# Altium PCB DeviceControl.PcbDoc
Units mm, origin at the board's own origin, x right, y up, seen from the top; angles counter-clockwise.
Board outline 210.5 x 151.5 mm, 2 copper layers (Top Layer, Bottom Layer); 64 components, 55 nets, 213 pads, 0 vias.
Unrouted connection lines stored in the file: 140.
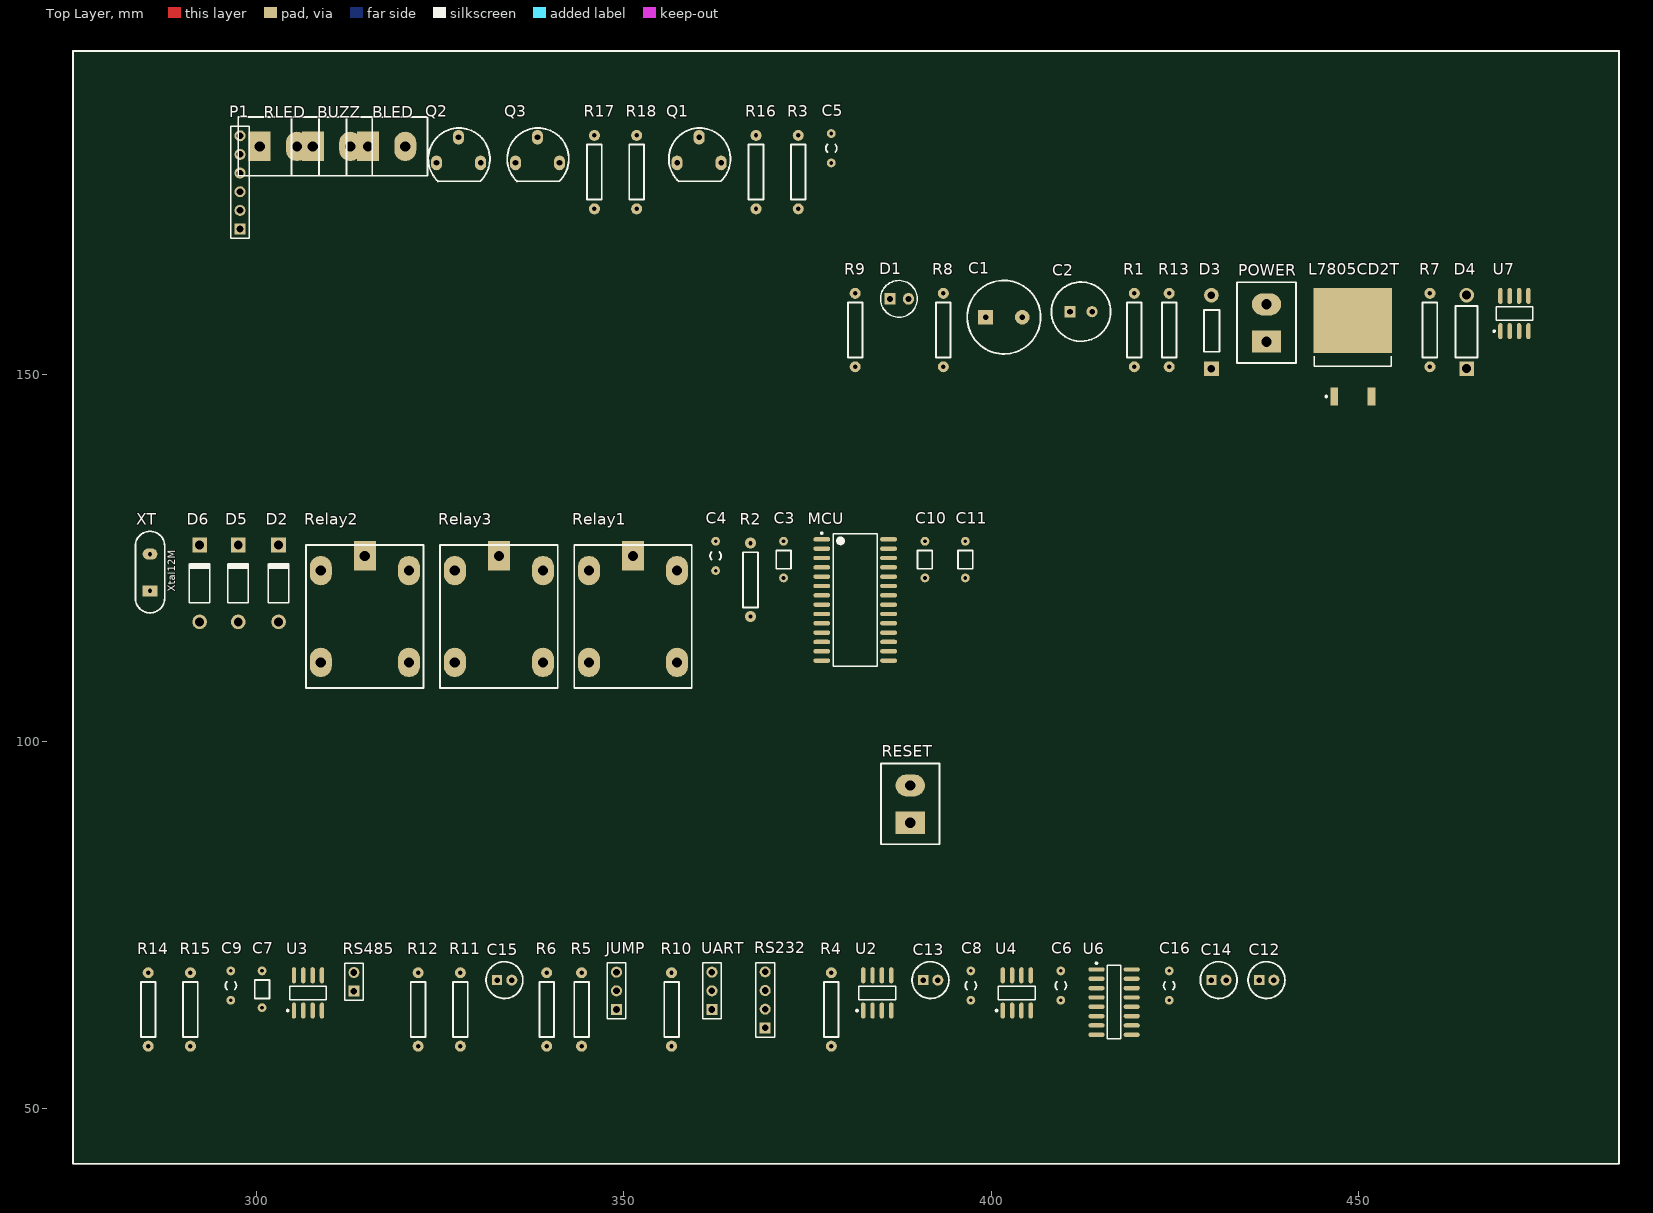
[diagram p0: Top Layer view]
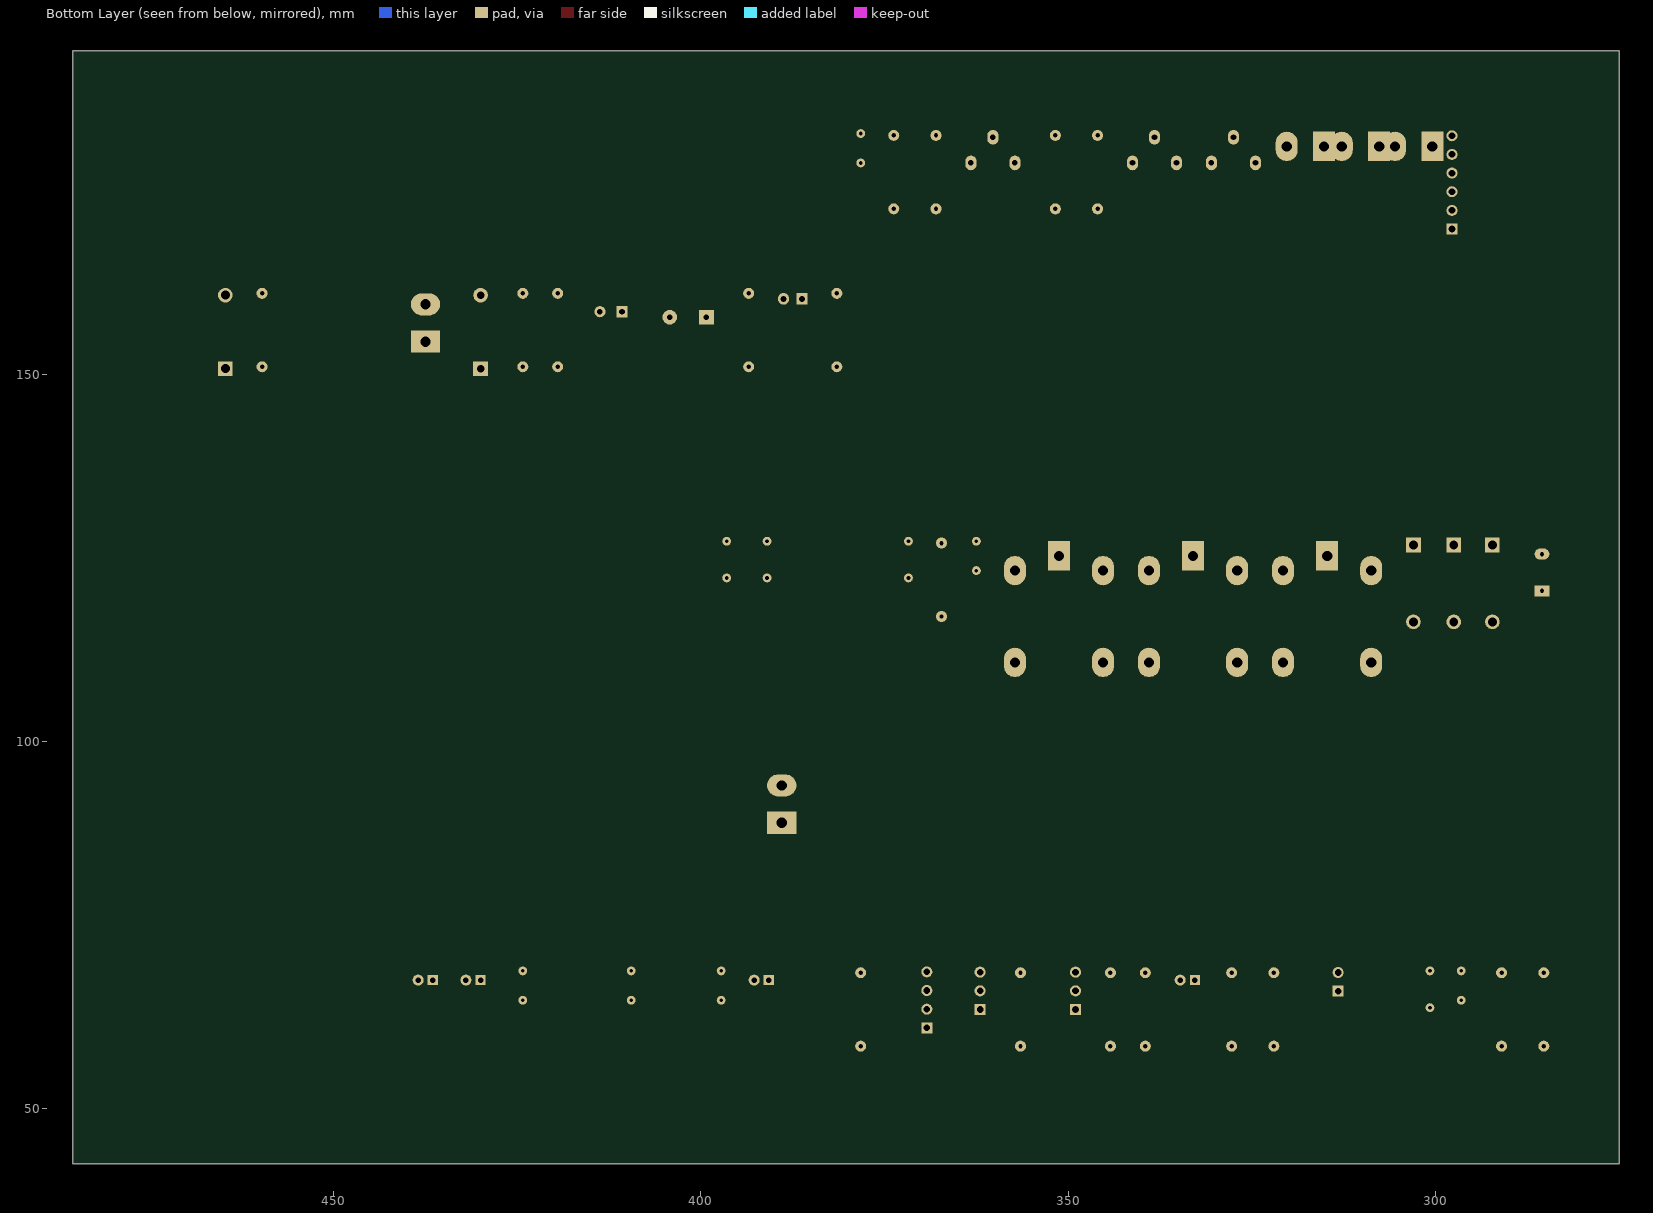
[diagram p1: Bottom Layer view, seen from below]

## Layer stack, top to bottom
Top Layer: signal copper 0.0356
Dielectric: dielectric 0.32, FR-4, Dk 4.8
Bottom Layer: signal copper 0.0356

## Board outline
275,194 275,42.5 485.5,42.5 485.5,194 275,194

## Design rules (kind name [scope] priority, off if disabled: settings)
Clearance [All] p1: gap=0.5
PlaneClearance [All] p1: clearance=0.8
PlaneConnect [All] p1: planeconnectstyle=Relief reliefexpansion=1 reliefentries=4 reliefconductorwidth=1 reliefairgap=1
PolygonConnect [All] p1: connectstyle=Relief reliefconductorwidth=1 reliefentries=4 polygonreliefangle="90 Angle"
RoutingLayers [All] p1: top layer_v5=FALSE bottom layer_v5=TRUE
RoutingTopology [All] p1: topology=Daisy_Balanced
RoutingVias [All] p1: holewidth=1 width=1.5 viastyle="Through Hole" minholewidth=0.711 minwidth=1.27 maxholewidth=1.5 maxwidth=2
SilkscreenOverComponentPads [All] p1: minsilkscreentomaskgap=0.254
SolderMaskExpansion [All] p1: expansion=1
Width [All] p1: maxlimit=2 minlimit=0.4 preferedwidth=1
23 further rules are at their usual default settings.

## Components (designator, comment, footprint, x,y, rotation, side; value= is the part's Value field where it differs from the comment)
BLED "Header 2" "Header2 - duplicate" 320.249,181 r0 top
BUZZ "Header 2" "Header2 - duplicate" 312.749,181 r0 top
C1 "Cap2" "TU 220uF/50V" 399.249,157.75 r0 top
C2 "Cap2" "tu 100uF/50v" 412.749,158.5 r0 top
C3 "Cap" C104_YELLOW 371.749,124.75 r90 top
C4 "Cap" C104_PINK 362.499,125.25 r90 top
C5 "Cap" C104_PINK 378.249,180.75 r90 top
C6 "Cap" C104_PINK 409.499,66.75 r90 top
C7 "Cap" C104_YELLOW 300.749,66.25 r90 top
C8 "Cap" C104_PINK 397.249,66.75 r90 top
C9 "Cap" C104_PINK 296.499,66.75 r90 top
C10 "Cap Pol1" C104_YELLOW 390.999,124.75 r90 top
C11 "Cap Pol1" C104_YELLOW 396.499,124.75 r90 top
C12 "Cap Pol1" "tu 10uF" 438.498,70.5 r0 top
C13 "Cap Pol1" "tu 10uF" 392.749,70.5 r0 top
C14 "Cap Pol1" "tu 10uF" 431.999,70.5 r0 top
C15 "Cap Pol1" "tu 10uF" 334.749,70.5 r0 top
C16 "Cap" C104_PINK 424.249,66.75 r90 top
D1 "LED0" LED_3 387.249,160.25 r0 top
D2 "Diode 1N4007" DIO10.46-5.3x2.8 302.999,121.5 r90 top
D3 "Diode 1N4007" D_1A 429.999,150.75 r90 top
D4 "Diode 2A" D_2A 464.749,150.75 r90 top
D5 "Diode 1N4007" DIO10.46-5.3x2.8 297.499,121.5 r90 top
D6 "Diode 1N4007" DIO10.46-5.3x2.8 292.249,121.5 r90 top
JUMP "Header 3" HDR1X3 348.999,63.5 r90 top
L7805CD2T "Volt Reg" TO254P1510-3_4N 449.249,153.75 r90 top
MCU "PIC16F886-E/SO" SOIC-SO28_N 381.499,119.25 r0 top
P1 "Header 6" HDR1X6 297.749,169.75 r90 top
POWER "Header 2" "Header2 - duplicate" 437.499,159.5 r90 top
Q1 "C945" C1815 359.749,180.75 r0 top
Q2 "C945" C1815 326.999,180.75 r0 top
Q3 "C945" C1815 337.749,180.75 r0 top
R1 "1K" R_Nor 419.499,156 r90 top
R2 "10K" R_Nor 367.249,122 r90 top
R3 "10K" R_Nor 373.749,177.5 r90 top
R4 "560R" R_Nor 378.249,63.5 r90 top
R5 "560R" R_Nor 344.249,63.5 r90 top
R6 "120R" R_Nor 339.499,63.5 r90 top
R7 "560R" R_Nor 459.749,156 r90 top
R8 "560R" R_Nor 393.499,156 r90 top
R9 "120R" R_Nor 381.499,156 r90 top
R10 "560R" R_Nor 356.499,63.5 r90 top
R11 "560R" R_Nor 327.749,63.5 r90 top
R12 "120R" R_Nor 321.999,63.5 r90 top
R13 "4K7" R_Nor 424.249,156 r90 top
R14 "4K7" R_Nor 285.249,63.5 r90 top
R15 "120R" R_Nor 290.999,63.5 r90 top
R16 "1K" R_Nor 367.999,177.5 r90 top
R17 "1K" R_Nor 345.999,177.5 r90 top
R18 "1K" R_Nor 351.749,177.5 r90 top
Relay1 "Relay12" "Role 12V" 347.249,114.75 r90 top
Relay2 "Relay12" "Role 12V" 310.749,114.75 r90 top
Relay3 "Relay12" "Role 12V" 328.999,114.75 r90 top
RESET "Header 2" "Header2 - duplicate" 389,94 r90 top
RLED "Header 2" "Header2 - duplicate" 305.499,181 r0 top
RS232 "Header 4" HDR1X4 369.249,61 r90 top
RS485 "Header 2" HDR1X2 313.249,66 r90 top
U2 "MAX485CSA" NSO8_N 384.499,65.75 r90 top
U3 "MAX485CSA" NSO8_N 306.999,65.75 r90 top
U4 "MAX485CSA" NSO8_N 403.499,65.75 r90 top
U6 "MAX232ACSE" NSO16_N 416.749,64.5 r0 top
U7 "NE555D" D008_N 471.249,158.25 r90 top
UART "Header 3" HDR1X3 361.999,63.5 r90 top
XT "XTAL" Xtal12M 287.499,123.5 r90 top

## Footprints (in the part's own frame and the unit in brackets; to place one, negate y for a bottom-side part, rotate by r counter-clockwise, add the part's x,y. Pads: shape width x height; smd on the part's side, far side on the other; paste and mask are expansions set on the pad)
C104_PINK [mm]
  round 1.2 hole 0.5: 1(-2,0) 2(2,0)
  silkscreen extent -0.53,-0.75 0.53,0.75, body extent -2.42,-1 2.5,1, height 6.96
C104_YELLOW [mm]
  round 1.2 hole 0.5: 1(-2.5,0) 2(2.5,0)
  silkscreen extent -1.25,-1 1.25,1
C1815 [mm]
  oval 1.524x2 hole 0.762: 1(-2.5,-2) 2(0.5,1.5) 3(3.5,-2)
  silkscreen extent -3.62,-4.52 4.76,2.75
D008_N [mm] "SOIC, 8-Leads, Body 4.9x3.9mm, Pitch 1.27mm, IPC Medium Density"
  oval 2.2x0.6 smd: 1(-2.4,1.905) 2(-2.4,0.635) 3(-2.4,-0.635) 4(-2.4,-1.905) 5(2.4,-1.905) 6(2.4,-0.635) 7(2.4,0.635) 8(2.4,1.905)
  silkscreen extent -2.52,-2.5 0.9,2.88, body extent -1.95,-2.45 1.95,2.45, height 1.75
D_1A [mm]
  rect 2x2 hole 1: 1(0,0)
  round 2 hole 1: 2(10,0)
  silkscreen extent 2.3,-1.1 8,1
D_2A [mm]
  rect 2x2 hole 1.2: 1(0,0)
  round 2 hole 1.2: 2(10,0)
  silkscreen extent 1.5,-1.5 8.5,1.5
DIO10.46-5.3x2.8 [mm] "Diode, Axial; Body 5.2 x 2.7 mm (LxDia. max), Lead Dia. 0.86 mm (max)"
  round 2 hole 1.2: 1(-5.23,0)
  rect 2x2 hole 1.2: 2(5.23,0)
  silkscreen extent -2.65,-1.4 2.75,1.4
HDR1X2 [mm] "Connector; Header; 2 Position"
  rect 1.5x1.5 hole 0.9: 1(0,0)
  round 1.5 hole 0.9: 2(2.54,0)
  silkscreen extent -1.27,-1.27 3.81,1.27
HDR1X3 [mm] "Connector; Header; 3 Position"
  rect 1.5x1.5 hole 0.9: 1(0,0)
  round 1.5 hole 0.9: 2(2.54,0) 3(5.08,0)
  silkscreen extent -1.27,-1.27 6.35,1.27
HDR1X4 [mm] "Connector; Header; 4 Position"
  rect 1.5x1.5 hole 0.9: 1(0,0)
  round 1.5 hole 0.9: 2(2.54,0) 3(5.08,0) 4(7.62,0)
  silkscreen extent -1.27,-1.27 8.89,1.27
HDR1X6 [mm] "Connector; Header; 6 Position"
  rect 1.5x1.5 hole 0.9: 1(0,0)
  round 1.5 hole 0.9: 2(2.54,0) 3(5.08,0) 4(7.62,0) 5(10.16,0) 6(12.7,0)
  silkscreen extent -1.27,-1.27 13.97,1.27
"Header2 - duplicate" [mm]
  rect 3x4 hole 1.4: 1(-5.08,0)
  oval 3x4 hole 1.4: 2(0,0)
  silkscreen extent -8,-4 3,4
LED_3 [mm]
  rect 1.5x1.6 hole 0.8: 1(-1,0)
  oval 1.5x1.6 hole 0.8: 2(1.5,0)
  silkscreen extent -2.3,-2.5 2.7,2.5, body extent -1.24,-1.99 2.24,2, height 5.2
NSO8_N [mm] "SOIC, 8-Leads, Body 4.9x3.9mm, Pitch 1.27mm, IPC Medium Density"
  oval 2.2x0.6 smd: 1(-2.4,1.905) 2(-2.4,0.635) 3(-2.4,-0.635) 4(-2.4,-1.905) 5(2.4,-1.905) 6(2.4,-0.635) 7(2.4,0.635) 8(2.4,1.905)
  silkscreen extent -2.52,-2.5 0.9,2.88, body extent -2,-2.5 2,2.5, height 1.75
NSO16_N [mm] "SOIC, 16-Leads, Body 9.9x3.9mm, Pitch 1.27mm, IPC Medium Density"
  oval 2.2x0.6 smd: 1(-2.4,4.445) 2(-2.4,3.175) 3(-2.4,1.905) 4(-2.4,0.635) 5(-2.4,-0.635) 6(-2.4,-1.905) 7(-2.4,-3.175) 8(-2.4,-4.445) 9(2.4,-4.445) 10(2.4,-3.175) 11(2.4,-1.905) 12(2.4,-0.635) 13(2.4,0.635) 14(2.4,1.905) 15(2.4,3.175) 16(2.4,4.445)
  silkscreen extent -2.52,-5 0.9,5.42, body extent -2,-5 2,5, height 1.75
R_Nor [mm]
  round 1.5 hole 0.6: 1(-5,0) 2(5,0)
  silkscreen extent -3.75,-1 3.75,1, body extent -5.4,-1.25 5.4,1.15, height 2.6
"Role 12V" [mm]
  rect 4x3 hole 1.4: 1(10.5,-4)
  oval 4x3 hole 1.4: 2(-4,-10) 3(-4,2) 4(8.5,2) 5(8.5,-10)
  silkscreen extent -7.5,-12 12,4, body extent -3.35,-9.55 12.35,2.75, height 13.46
SOIC-SO28_N [mm] "SOIC, 28-Leads, Body 17.9x7.5mm, Pitch 1.27mm, IPC Medium Density"
  oval 2.3x0.6 smd: 1(-4.55,8.255) 2(-4.55,6.985) 3(-4.55,5.715) 4(-4.55,4.445) 5(-4.55,3.175) 6(-4.55,1.905) 7(-4.55,0.635) 8(-4.55,-0.635) 9(-4.55,-1.905) 10(-4.55,-3.175) 11(-4.55,-4.445) 12(-4.55,-5.715) 13(-4.55,-6.985) 14(-4.55,-8.255) 15(4.55,-8.255) 16(4.55,-6.985) 17(4.55,-5.715) 18(4.55,-4.445) 19(4.55,-3.175) 20(4.55,-1.905) 21(4.55,-0.635) 22(4.55,0.635) 23(4.55,1.905) 24(4.55,3.175) 25(4.55,4.445) 26(4.55,5.715) 27(4.55,6.985) 28(4.55,8.255)
  silkscreen extent -4.67,-9.05 3,9.23, body extent -3.8,-9.06 3.8,9.06, height 2.65
TO254P1510-3_4N [mm] "D2-PAK, 4-Leads, Body 8.8x10.4mm, Pitch 2.54mm, Lead Span 15.1mm, IPC Medium Density"
  rect 2.4x1.05 smd: 1(-6.8,2.54) 3(-6.8,-2.54)
  rect 8.9x10.65 smd: 2(3.55,0)
  silkscreen extent -6.92,-5.25 -1.3,5.25, body extent -2.7,-5.28 6.3,5.28, height 4.69
"tu 10uF" [mm]
  rect 1.4x1.4 hole 0.762: 1(-2,-3)
  round 1.5 hole 0.762: 2(0,-3)
  silkscreen extent -3.5,-5.5 1.5,-0.5
"tu 100uF/50v" [mil]
  rect 60x60 hole 30: 1(-78.74,0)
  round 60 hole 30: 2(39.37,0)
  silkscreen extent -178,-159 139,159
"TU 220uF/50V" [mm]
  rect 2x2 hole 0.762: 1(0,0)
  round 2 hole 0.762: 2(5,0)
  silkscreen extent -2.5,-5 7.5,5
Xtal12M [mm]
  rect 1.5x2 hole 0.6: 1(-3,2)
  oval 1.5x2 hole 0.6: 2(2,2)
  silkscreen extent -6,0 5.1,4, body extent -5.83,0.45 4.83,3.5, height 3.19

## Part data
BLED BUZZ POWER RESET RLED RS485: "Header, 2-Pin"
C1 C2: "Capacitor"
C3 C4 C5 C6 C7 C8 C9 C16: library part Ceramic, "Capcitor"
C10 C11 C12 C13 C14 C15: "Polarized Capacitor (Radial)"
D1: "Typical INFRARED GaAs LED"
D2 D3 D5 D6: "1 Amp General Purpose Rectifier"
D4: library part "Diode 1N4007", "1 Amp General Purpose Rectifier"
JUMP UART: "Header, 3-Pin"
L7805CD2T: "Voltage Regulator"
MCU: "Flash-Based, 8-Bit CMOS Microcontroller with nanoWatt Technology, 8K (x14-Bit words) Program Memory, 624 Bytes Data Memory, 24 I/O pins, 28-Pin SOIC, Standard VDD Range, Extended Temperature"
P1: "Header, 6-Pin"
Q1 Q2 Q3: library part 2N3904, "NPN General Purpose Amplifier"
R1 R2 R3 R4 R5 R6 R7 R8 R9 R10 R11 R12 R13 R14 R15 R16 R17 R18: library part Res
Relay1 Relay2 Relay3: library part Role_12V
RS232: "Header, 4-Pin"
U2 U3 U4: "Low-Power, Slew-Rate-Limited RS-485/RS-422 Transceiver"
U6: "+5V Powered, Multi-Channel RS-232 Driver/Receiver"
U7: "Precision Timer"
XT: "Crystal Oscillator"

## Nets (pads, with @x,y where several pads share a name; then routed paths per layer and width w, separated by ;. In a path a pad name is that pad's centre, name@x,y a point inside that pad or via, vN(x,y) a via of type N, cw(c..) or ccw(c..) an arc to the next point about the centre after c; other vN are vias at no path point)
12V: D2.2 D4.1 D5.2 D6.2 POWER.1 Relay1.4 Relay2.4 Relay3.4
A_485: R4.1 R6.1 R7.1 R9.1 R10.1 R12.1 RS485.1 U2.6 U3.6 U4.6
B_485: R5.2 R6.2 R8.2 R9.2 R11.2 R12.2 RS485.2 U2.7 U3.7 U4.7
BLED: MCU.2
BUZZ: MCU.4
DI: MCU.17 U3.4
EN: JUMP.1 MCU.16 U3.2 U3.3 U7.3
GND: C1.2 C2.2 C3.2 C4.2 C5.2 C6.2 C7.1 C8.1 C9.1 C10.2 C11.2 C15.1 C16.1 D1.2 L7805CD2T.2 MCU.8 MCU.19 P1.3 POWER.2 Q1.1 Q2.1 Q3.1 R5.1 R8.1 R11.1 RESET.1 RS232.4 U2.5 U3.5 U4.5 U6.15 U7.1
ICSPCLK: MCU.27 P1.5
ICSPDAT: MCU.28 P1.4
LVP: P1.6
MCLR: MCU.1 P1.1 R3.1
NetBLED_1: BLED.1 Relay1.1
NetBLED_2: BLED.2 Relay1.3
NetBUZZ_1: BUZZ.1 Relay3.1
NetBUZZ_2: BUZZ.2 Relay3.3
NetC1_1: C1.1 D4.2 L7805CD2T.1
NetC4_1: C4.1 MCU.10 XT.2
NetC5_1: C5.1 MCU.9 XT.1
NetC10_1: C10.1 U7.5
NetC11_1: C11.1 R15.2 U7.6 U7.7
NetC12_1: C12.1 U6.1
NetC12_2: C12.2 U6.3
NetC13_1: C13.1 U6.4
NetC13_2: C13.2 U6.5
NetC14_1: C14.1 U6.2
NetC15_2: C15.2 U6.6
NetD1_1: D1.1 R1.1
NetD2_1: D2.1 Q2.2 Relay2.5
NetD3_1: D3.1 R13.1
NetD5_1: D5.1 Q1.2 Relay1.5
NetD6_1: D6.1 Q3.2 Relay3.5
NetJUMP_2: JUMP.2 U4.2 U4.3
NETLABEL9: R16.2
NETLABEL10: R17.2
NETLABEL11: R18.2
NetQ1_3: Q1.3 R16.1
NetQ2_3: Q2.3 R17.1
NetQ3_3: Q3.3 R18.1
NetR14_2: R14.2 U7.4
NetRelay2_1: Relay2.1 RLED.1
NetRelay2_3: Relay2.3 RLED.2
RESET: MCU.5 R2.1 RESET.2
RLED: MCU.3
RO: MCU.18 U3.1
RTS: RS232.3 U6.8
RTS_TLL: JUMP.3 U6.9
RX: RS232.1 U6.14
RX1: U2.1 UART.1
RX_TTL: U4.1 U6.11
TX: RS232.2 U6.13
TX1: U2.4 UART.3
TX_EN: U2.2 U2.3 UART.2
TX_TTL: D3.2 U4.4 U6.12 U7.2
VCC: C2.1 C3.1 C6.1 C7.2 C8.2 C9.2 C14.2 C16.2 L7805CD2T.3 MCU.20 P1.2 R1.2 R2.2 R3.2 R4.2 R7.2 R10.2 R13.2 R14.1 R15.1 U2.8 U3.8 U4.8 U6.16 U7.8
pads on no net: MCU.6 MCU.7 MCU.11 MCU.12 MCU.13 MCU.14 MCU.15 MCU.21 MCU.22 MCU.23 MCU.24 MCU.25 MCU.26 Relay1.2 Relay2.2 Relay3.2 U6.7 U6.10

## Silkscreen, mask and mechanical layers (free items; w line width, h text height)
Top Overlay:
  the board outline again, w0.254

## Text inside footprints (layer, text, board x,y; h text height)
XT: Top Overlay "Xtal12M" at 288.899,120.4 h1 r90